# Altium PCB Sim900_V3.PcbDoc
Units mil, origin at the board's own origin, x right, y up, seen from the top; angles counter-clockwise.
Board outline 2375 x 2088 mil, 2 copper layers (Top Layer, Bottom Layer); 25 components, 0 nets, 133 pads, 41 vias.
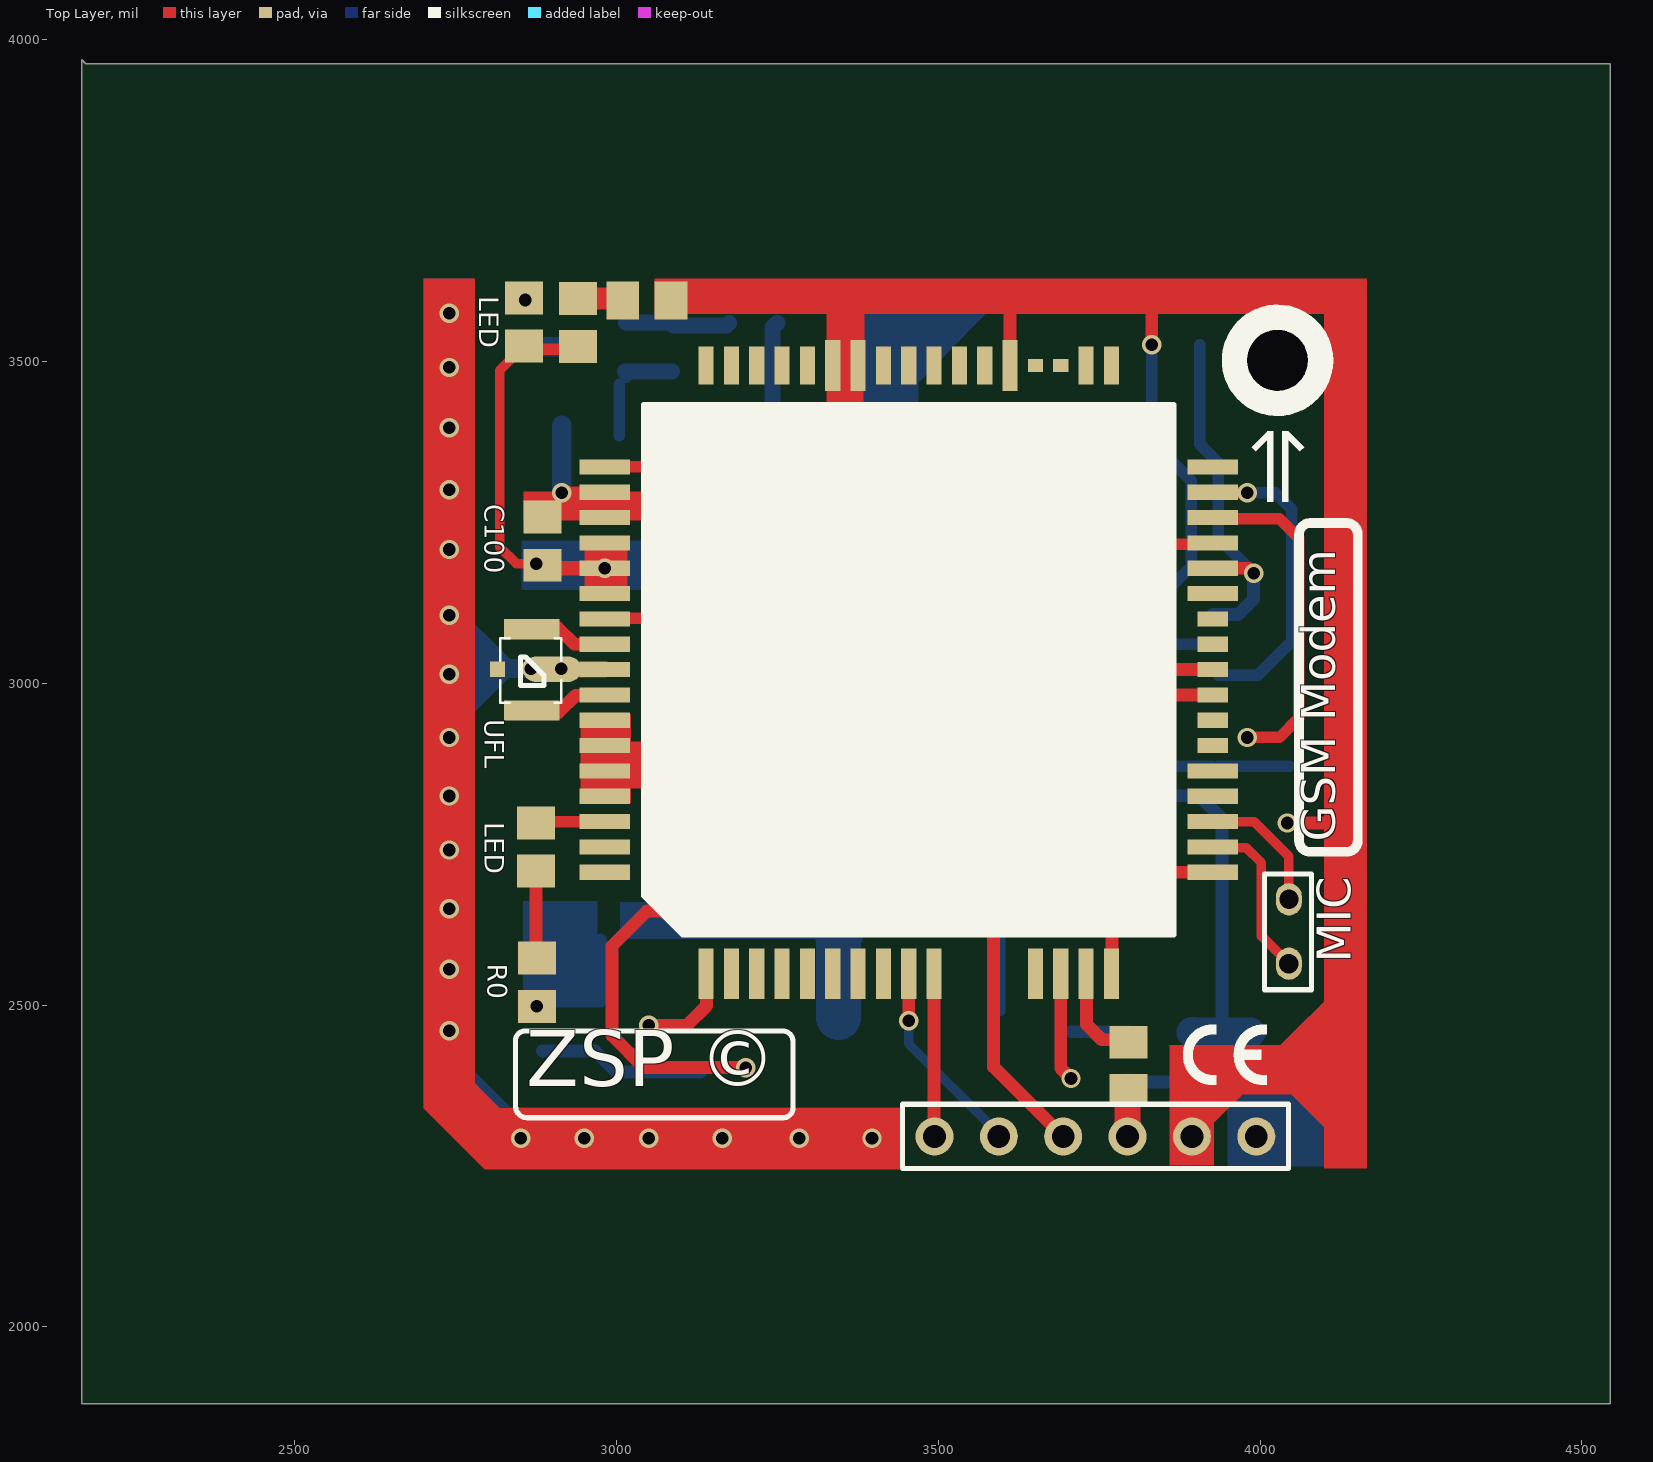
[diagram p0: Top Layer view]
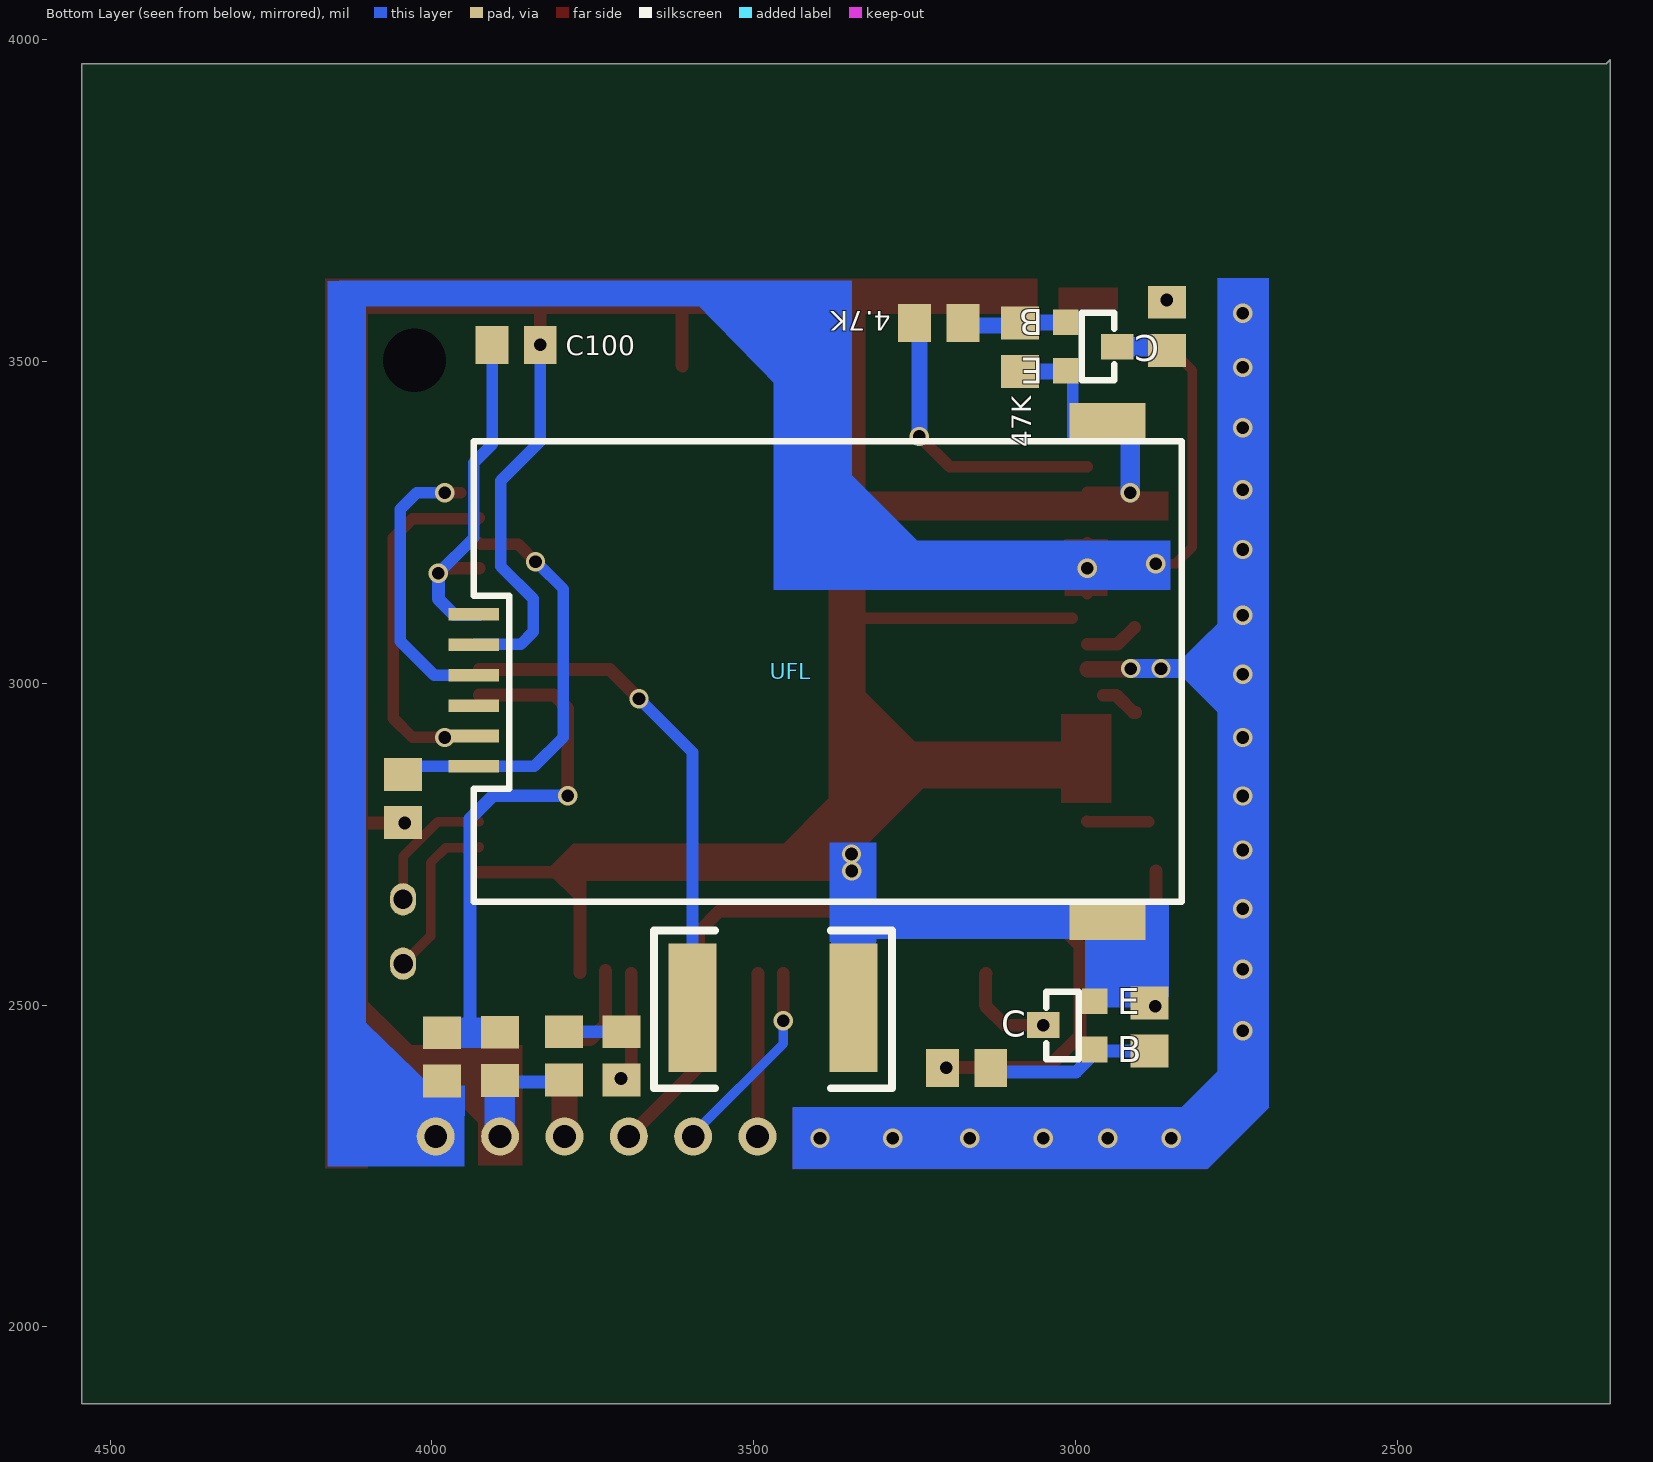
[diagram p1: Bottom Layer view, seen from below]

## Layer stack, top to bottom
Top Solder: solder mask 0.4, Solder Resist, Dk 3.5
Top Layer: signal copper 1.4
Dielectric1: core 12.6, FR-4, Dk 4.8
Bottom Layer: signal copper 1.4
Bottom Solder: solder mask 0.4, Solder Resist, Dk 3.5

## Board outline
2169,3969 2175,3963 4544,3963 4544,1881 2169,1881

## Design rules (kind name [scope] priority, off if disabled: settings)
Clearance [All] p1: gap=10
PolygonConnect [All] p1: connectstyle=Relief reliefconductorwidth=10 reliefentries=4 polygonreliefangle="90 Angle" airgapwidth=10
RoutingVias [All] p1: holewidth=28 width=50 viastyle="Through Hole" minholewidth=28 minwidth=50 maxholewidth=28 maxwidth=50
SilkToSolderMaskClearance SilkscreenOverComponentPads [IsPad] p1: minsilkscreentomaskgap=10 clearancetoexposedcopper=TRUE
SolderMaskExpansion [All] p1: expansion=4
UnpouredPolygon [All] p1: allowunpoured=FALSE
Width [All] p1: maxlimit=10 minlimit=10 preferedwidth=10
28 further rules are at their usual default settings.

## Components (designator, comment, footprint, x,y, rotation, side; value= is the part's Value field where it differs from the comment)
4.7K "Comment" 2012[0805]#1 3212.33,3560.28 r0 bottom
47K "Comment" 2012[0805]#1 3086.41,3522.32 r90 bottom
C100 "Comment" 2012[0805]#1 2885,3221 r270 top
C100 "Comment" 2012[0805]#1 3869,3526 r180 bottom
LED "Comment" 2012[0805]#2 2856.25,3561.48 r90 top
LED "Comment" 2012[0805]#2 2875,2745.6 r90 top
R0 "Comment" 2012[0805]#2 2876,2535.59 r90 top
UFL "SIMCard1" SIMCard1 3935,2871 r270 bottom (schematic designator SIM1)
? "Comment" 2012[0805]#1 3794.65,2421.27 r270 bottom
? "Comment" 2012[0805]#1 3705.65,2421.27 r270 bottom
? "Comment" 2012[0805]#1 3795.19,2405.01 r270 top
? "Comment" 2012[0805]#1 3984.6,2419.68 r270 bottom
? "Comment" 2012[0805]#1 3894,2420.47 r270 bottom
? "Comment" HDR1X6 3994,2296 r180 top
? "Comment" 2012[0805]#2 2940,3560.88 r90 top
? "Comment" 2220 3495,2495.97 r180 bottom
? "Comment" UFL 2865,3021 r270 top
? "Comment" 2012[0805]#1 2858.06,3554.86 r270 bottom
? "Comment" SMD-tr 3015,3561 r0 bottom
? "Comment" 2012[0805]#1 4045,2821 r270 bottom
? "Comment" 2012[0805]#1 3168.96,2402.24 r180 bottom
? "Comment" SIM900 3455,3051 r180 top
? "Comment" SMD-tr 2970,2431 r180 bottom
? "Comment" 2012[0805]#1 2885,2466 r270 bottom
? "Comment" 2012[0805]#3 3047,3594.62 r180 top

## Footprints (in the part's own frame and the unit in brackets; to place one, negate y for a bottom-side part, rotate by r counter-clockwise, add the part's x,y. Pads: shape width x height; smd on the part's side, far side on the other; paste and mask are expansions set on the pad)
2012[0805]#1 [mm] "Chip Resistor; Body 2.0 x 1.3 mm (LxW typ)"
  rect 1.3x1.5 smd: 1(-0.95,0) 2(0.95,0)
2012[0805]#2 [mm] "Chip Resistor; Body 2.0 x 1.3 mm (LxW typ)"
  rect 1.3x1.5 smd: 2(0.95,0) vcc(-0.95,0)
2012[0805]#3 [mm] "Chip Resistor; Body 2.0 x 1.3 mm (LxW typ)"
  rect 1.3x1.5 smd: 2(0.95,0) GND(-0.95,0)
2220 [mil]
  rect 75x200 smd: 1(-100,0) 2(150,0)
  silkscreen extent -160,-125 210,120
HDR1X6 [mm]
  round 1.5 hole 0.9: 1-VCC(0,0) 2-GND(2.54,0) 3-RST(5.08,0) 4_PwrKey(7.62,0) 5_TX(10.16,0) 6-RX(12.7,0)
  silkscreen extent -1.27,-1.27 13.97,1.27
SIM900 [mm]
  rect 0.6x2 smd: 1_PWJ(8.026,12.751) 2(7.026,12.751) 3(6.026,12.751) 4-RI(5.026,12.751) 5(4.026,12.751) 6(3.026,12.751) 7(2.026,12.751) 8(1.026,12.751) 9-TX(0.026,12.751) 10-RX(-0.974,12.751) 14(-4.974,12.751) "15-VDD EXT"(-5.974,12.751) 16-Nreset(-6.974,12.751) 17(-7.974,12.751) 39(-3.974,-11.249) 45(2.026,-11.249) 46(3.026,-11.249)
  rect 0x0 smd: 11(-1.974,12.751) 12(-2.974,12.751) 13(-3.974,12.751)
  rect 2x0.6 smd: 18(-11.974,8.751) 19(-11.974,7.751) 20(-11.974,6.751) 21(-11.974,5.751) 22(-11.974,4.751) 29(-11.974,-2.249) 30(-11.974,-3.249) 31(-11.974,-4.249) 32(-11.974,-5.249) 33(-11.974,-6.249) 34(-11.974,-7.249) "52-NET LIGHT"(12.026,-7.249) 53(12.026,-6.249) 54(12.026,-5.249) 55(12.026,-4.249) 56(12.026,-3.249) 57(12.026,-2.249) 58(12.026,-1.249) 59(12.026,-0.249) 60(12.026,0.751) 61(12.026,1.751) 62(12.026,2.751) 63(12.026,3.751) 64(12.026,4.751) 65(12.026,5.751) 66(12.026,6.751) 67(12.026,7.751) 68(12.026,8.751)
  rect 1.2x0.6 smd: 23(-11.974,3.751) 24(-11.974,2.751) 25(-11.974,1.751) 26(-11.974,0.751) 27(-11.974,-0.249) 28(-11.974,-1.249)
  rect 0.6x1.5 smd: 35(-7.974,-11.249) 36(-6.974,-11.249) 40(-2.974,-11.249) 41(-1.974,-11.249) 42(-0.974,-11.249) 43(0.026,-11.249) 44(1.026,-11.249) 47(4.026,-11.249) 48(5.026,-11.249) 49(6.026,-11.249) 50(7.026,-11.249) 51(8.026,-11.249)
  rect 0.6x0.5 smd: 37(-5.974,-11.249) 38(-4.974,-11.249)
  silkscreen extent -10.44,-9.71 10.49,11.22
SIMCard1 [mm]
  rect 1.524x3 smd: 0(-13.589,25.019) 0(6.096,25.019)
  rect 0.5x2 smd: 1(SIM-VCC)(-6,0) 2(SIM_RST)(-3.6,0) 3(SIM_CLK)(-1.2,0) 4(GND)(-4.8,0) 5(-2.4,0) 6(SIM_DATA)(0,0)
  silkscreen extent -12.83,0 5.33,27.94
SMD-tr [mil]
  rect 40x40 smd: 1(0,0) 2(0,75)
  rect 50x40 smd: 3(-80,38)
  silkscreen extent -75,-15 -25,90
UFL [mm]
  oval 1x2.3 smd: 1(-0.025,0.887)
  rect 0.8x2.2 smd: 2(-1.6,0.076) 2(1.6,0.076)
  rect 0.6x0.6 smd: 2(-0.025,-1.27)
  silkscreen extent -1.24,-1.17 1.3,1.24

## Free pads (board coordinates)
  oval 40x50 hole 30: 0(4044.73,2564.45) 1(4044.74,2664.46)
  round 60 hole 98.43: 2(4027,3502)

## Via types
v1: diameter 30, hole 19.68, Top Layer to Bottom Layer, tented both sides, 40 vias
v2: diameter 30, hole 19.68, Top Layer to Bottom Layer, 1 vias

## Nets (pads, with @x,y where several pads share a name; then routed paths per layer and width w, separated by ;. In a path a pad name is that pad's centre, name@x,y a point inside that pad or via, vN(x,y) a via of type N, cw(c..) or ccw(c..) an arc to the next point about the centre after c; other vN are vias at no path point)
pads on no net: 4.7K.1 4.7K.2 47K.1 47K.2 "?.15-VDD EXT" "?.52-NET LIGHT" ?.1 ?.1-VCC ?.1_PWJ ?.2 ?.2-GND ?.3 ?.3-RST ?.4-RI ?.4_PwrKey ?.5 ?.5_TX ?.6 ?.6-RX ?.7 ?.8 ?.9-TX ?.10-RX ?.11 ?.12 ?.13 ?.14 ?.16-Nreset ?.17 ?.18 ?.19 ?.20 ?.21 ?.22 ?.23 ?.24 ?.25 ?.26 ?.27 ?.28 ?.29 ?.30 ?.31 ?.32 ?.33 ?.34 ?.35 ?.36 ?.37 ?.38 ?.39 ?.40 ?.41 ?.42 ?.43 ?.44 ?.45 ?.46 ?.47 ?.48 ?.49 ?.50 ?.51 ?.53 ?.54 ?.55 ?.56 ?.57 ?.58 ?.59 ?.60 ?.61 ?.62 ?.63 ?.64 ?.65 ?.66 ?.67 ?.68 ?.GND ?.vcc C100.1 C100.2 LED.2 LED.vcc R0.2 R0.vcc UFL.0 UFL.1(SIM-VCC) UFL.2(SIM_RST) UFL.3(SIM_CLK) UFL.4(GND) UFL.5 UFL.6(SIM_DATA)
copper on no net: | length 16968
  Top Layer w10: 3926.4,2982.07 3928.61,2984.28
  Top Layer w15: 2856.25,3524.08 2818.3,3486.13 2818.3,3212.02 2844.32,3186 v1(2875,3186) ; 2915,3261 2978.18,3261 ; 3794,2296 3794,2312 ; 3926.4,2745.85 3927.51,2744.74 3978.37,2744.74 4001.81,2721.3 4001.81,2607.37 4044.73,2564.45 ; 3926.4,2785.22 3990.74,2785.22 4044.74,2731.22 4044.74,2664.46
  Top Layer w18: 2864.75,3519.52 2939.75,3519.52 ; v1@2885,3183.6 2889.68,3178.92 ; 2885.78,2785.22 2981.52,2785.22 2982.3,2786 ; v1(2915,3296) 2916.03,3297.03 2981.52,3297.03 ; 2981.52,3139.55 2981.52,3218.29 ; 2981.52,3336.4 3195.12,3336.4 v1(3242.46,3383.74) ; 3005,3101 3335,3101 ; 3006.52,2901 3335,2901 ; 3010,2846 3335,2846 ; 3335,3516 3375,3516 ; 3335,3600 3335,3493.03 ; 3335.85,3493.88 3335,3493.03 ; 3340,3476 3375,3476 ; 3375.22,3493.88 3375,3493.66 3375,3286 3375,2741 3409.52,2706.48 3766.04,2706.52 ; 3376,3485.03 3376,3592 ; 3610,3492.44 3611.44,3493.88 ; 3795,2706.48 3359.52,2706.48 3335,2731 3335,2921 3335,3493.03 ; v1(3839,3189) 3866,3216 3924.11,3216 3926.4,3218.29 ; 3925.33,2981 3926.4,2982.07 ; 3926.4,3257.66 3928.06,3256 4030,3256 4060.07,3225.93 4060.07,3073.07 4060.07,2946.07 4030,2916 v1(3980,2916) ; 3955,3296 v1@3980,3296
  Top Layer w20: 2875,2572.99 2875,2708.2 ; 2906.26,2954.75 2909.87,2954.75 2936.68,2981.57 2956.57,2981.57 ; 2908.36,3087 2934.54,3060.81 2981.52,3060.81 ; 2960,3021 2965,3021 ; v1@3050,2468.83 3109.61,2468.83 3140,2499.22 3140,2548 3139,2549 ; v1(3200.89,2402.85) 3043.15,2402.85 2993,2453 2993,2592.02 3047.25,2646.27 3553.36,2646.27 3585.89,2613.73 3585.89,2404.11 3694,2296 ; v1(3454,2476) 3453.96,2549 ; 3487,2300 3489,2298 ; 3493.33,2298 3493.33,2427.67 3493.33,2549 ; 3580,2294 3580,2303 ; 3611.44,3493.88 3611.44,3597.44 3614,3600 ; v1(3678.23,2976) 3723.68,3021.44 3926.4,3021.44 ; 3690.18,2549 3690.18,2401.94 v1(3706.19,2385.93) ; 3730.03,2553.61 3730.03,2470.17 3753.87,2446.33 3796.78,2446.33 ; 3766.04,2706.52 3926.4,2706.48 ; 3770,2551 3770,2696 ; v1(3788.84,2825.4) 3788.84,2960.5 3810.41,2982.07 3926.4,2982.07 ; 3789,2298 3790,2299 ; v1(3831.6,3526) 3831.6,3598 ; 3894,2296 3894,2356 3922,2384 4130,2384 ; 3926.4,3178.92 3982.08,3178.92 v1(3990,3171) ; 3940,3606 3944.6,3601.4 ; v1(4042,2783) 4132,2783 4139,2790
  Top Layer w23: 2889.68,3178.92 v1(2981.52,3178.92)
  Top Layer w25: v1@2899.92,3022 2980.96,3022
  Top Layer w40: 3794,2296 3794,2367.61
  Bottom Layer w15: v1(3454,2476) 3454,2440 3588,2306 3588,2298
  Bottom Layer w18: 3003.86,3384.95 3003.86,3464.86 ; 3015,3476 3015,3486 ; 3335,2476 3340,2481 ; v1@3340,2701 v1(3347.5,2708.5) ; 3595,2491 3595,2892.77 v1(3678.23,2976) ; v1(3831.6,3526) 3831.6,3376.4 3893,3315 3893,3181.73 3842.56,3131.29 3842.56,3080.08 3861.64,3061 3933.98,3061 3935,3059.98 ; v1@3835,3186 3795.57,3146.57 3795.57,2916.17 3840.74,2871 3925,2871 ; 3906.4,3526 3906.4,3371.6 3935,3343 3935,3226 v1(3990,3171) ; 3935,2871 4045,2871 ; 3935,3012.73 3996.34,3012.73 4049,3065.39 4049,3270.69 4023.62,3296.08 v1(3980,3296.08)
  Bottom Layer w20: 2750,3027 2754,3023 ; 2885,2428.6 2966.58,2428.6 2999.18,2396 3130.39,2396 ; v1@2885,2503.4 2887.6,2506 2970,2506 ; 2975,2506 2975,2601 ; 3329,2631 3358,2602 3358,2562 3355,2559 ; 3705.65,2458.67 3794.65,2458.67 ; v1(3788.84,2825.4) 3904.86,2825.4 3940.62,2789.64 3940.62,2456.66 ; 3794.65,2383.87 3798.16,2380.36 3894.53,2380.36 ; 3926.22,3107.22 3966.11,3107.22 3990,3131.11 v1(3990,3171)
  Bottom Layer w25: 3012.9,3484.36 3085.85,3484.36 3086.41,3484.92 ; 3015,3561 3085.13,3561 3086.41,3559.72 ; 3087.61,3556.06 3170.72,3556.06 3174.93,3560.28 ; v1(3242.46,3383.74) 3242.46,3553 3249.74,3560.28
  Bottom Layer w30: 2754,3023 v1(2914,3023) ; 2858.19,3523 2935,3523 ; v1(2915,3296) 2915,3401
  Bottom Layer w40: v1(2875,3186) 3259,3186 ; 3370.19,3297.19 3370.19,3542.81 3433.39,3606 4141,3606
  Bottom Layer w48: 3894,2383.06 3894.53,2382.53 3894.53,2292.95 ; 3894,2457.87 3894.78,2457.08 3984.6,2457.08
  Bottom Layer w70: 3259,3186 3370.19,3297.19 ; 3345,2481 v1@3345,2701
  other v1: 2851,2293 2950,2293 3050,2293 3164,2293 3284,2293 3397,2293 2740,2460 3050,2469 2876,2498.19 2740,2556 2740,2650 3348,2735 2740,2741 2740,2825 2740,2916 2740,3014 2867,3023 2740,3106 2740,3208 2740,3301 2740,3397 2740,3491 2740,3575
  other v2: 2858.06,3595.83

## Other copper
Top Layer:
  region: 3780.13,2693 3780.13,2751 3325,2751 3325,2693
  region: 3017,3136 3017,3224 2950,3224 2950,3136
  region: 3366.59,3253 3366.59,3298 2855.65,3298 2855.65,3253
  region: 3375,3470 3375,3522 3335,3522 3335,3470
  rectangle: 3219,3574 4166,3629
  rectangle: 4099,2246 4166,3574
  rectangle: 2700,2340 2780,3629
  region: 4126,2361 4126,2438 3864,2438 3864,2361
  region: 3928,2251 3928,2438 3859,2438 3859,2251
  region: 3372.6,2731.01 3372.6,3588.6 3334.99,3588.6 3334.99,2731.01
  region: 3022.54,2813.77 3022.54,2952.34 2944.22,2952.34 2944.22,2813.77
  region: 3348.5,2845.1 3348.5,2901.74 2988.19,2901.74 2988.19,2845.1
  region: 3218.99,3574.14 3218.99,3629.01 3058.69,3629.01 3058.69,3574.14
  region: 3026.16,3580.76 3026.16,3615.12 2933.96,3615.12 2933.96,3580.76
  region: 3771.77,2658.02 3822.68,2708.93 3822.68,2711.04 3821.17,2712.54 3772.97,2712.54
  region: 2700,2340 2795,2245 3440,2245 3440,2340
  region: 2757,2401 2880,2278 2880,2275 2821,2334 2732,2334
  region: 3999,2405 4154,2560 4154,2432 4130,2408
  region: 4032,2378 4126,2284 4126,2373 4127,2374
  region: 3997.5,2386.5 3902.5,2291.5 3902.5,2360.5 3912.5,2370.5
  region: 3780.13,2751 3824.19,2706.93 3824.19,2698.38 3820.27,2702.3 3739.83,2702.3
  region: 3225.59,2882.45 3225.59,2884.86 3350.91,3010.18 3350.91,2892.09 3353.32,2889.68
  region: 3354.53,2849.92 3490.7,2713.75 3490.7,2704.11 3352.12,2704.11
  region: 3340.93,2735.32 3338.52,2735.32 3213.2,2860.64 3331.29,2860.64 3333.7,2863.05
Bottom Layer:
  rectangle: 3333,3209 3387,3261
  rectangle: 3347,3145 3469,3626
  rectangle: 2852,3145 3469,3222
  region: 3382,2598 3382,2753 3309,2753 3309,2598
  region: 3327,2603 3327,2660 3005,2660 3005,2603
  rectangle: 4102,2249 4162,3625
  rectangle: 3949,2249 4149,2328.52
  rectangle: 2699,2341 2779,3630
  region: 2970.72,2512.51 2970.72,2661.93 2854.44,2661.93 2854.44,2512.51
  region: 3622.75,3624.75 3431.25,3429.25 3371.25,3429.25 3365.25,3435.25 3365.25,3624.25
  region: 2699,2341 2794,2246 3439,2246 3439,2341
  region: 2726.73,2449.23 2884.55,2291.41 2884.55,2263.14 2855.63,2292.06 2752,2292.06
  region: 2747.18,2923.41 2847.2,3023.43 2848.41,3023.43 2733.94,3137.9 2733.94,3194.55
  region: 3949,2328.52 3948.57,2374.41 4001.42,2374.41 4124.2,2493.61 4151,2508.52 4140,2497.52 4140,2279.52

## Silkscreen, mask and mechanical layers (free items; w line width, h text height)
Top Overlay:
  drawing of 398 lines, arcs and shapes, not listed
  text "GSM Modem" at 4135,2753.6 h90 r90
  text "MIC" at 4159,2566 h90 r90
  text "ZSP ©" at 2860,2345 h150
Top Solder:
  lines w35: 2740,3575 2740,2460 2740,2372 2820,2292 3396,2292
Bottom Solder:
  lines w10: 2693,2337 2693,3189.75 2693,3637 4170,3637 4170,2238 2792,2238 2693,2337
  lines w35: 2740,3575 2740,2460 2740,2370 2817,2293 3397,2293

## Text inside footprints (layer, text, board x,y; h text height)
?: Bottom Overlay "B" at 3050,3581 h40 r180; Bottom Overlay "E" at 3050,3506 h40 r180; Bottom Overlay "C" at 2870,3541 h40 r180
?: Bottom Overlay "B" at 2935,2411 h40; Bottom Overlay "E" at 2935,2486 h40; Bottom Overlay "C" at 3115,2451 h40